# Altium PCB Exp 9.PcbDoc
Units mm, origin at the board's own origin, x right, y up, seen from the top; angles counter-clockwise.
Board outline 152.4 x 136.53 mm, 2 copper layers (Top Layer, Bottom Layer); 86 components, 149 nets, 293 pads, 0 vias.
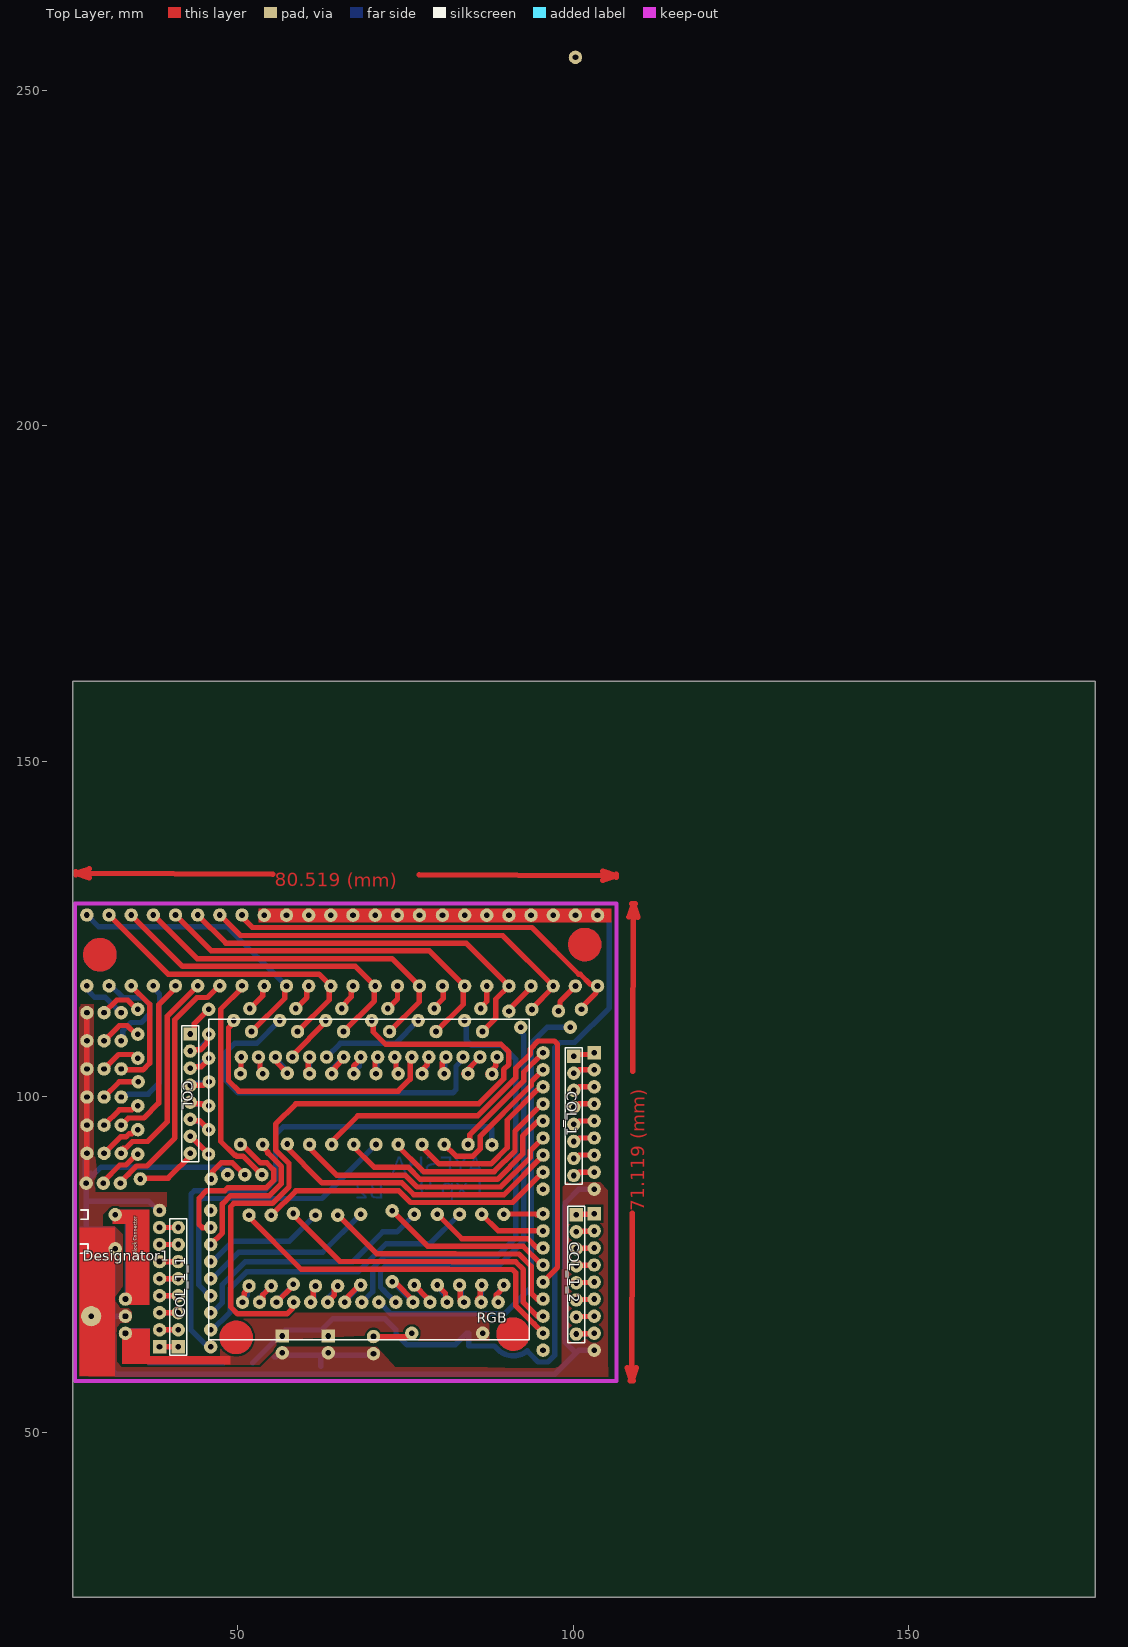
[diagram p0: Top Layer view]
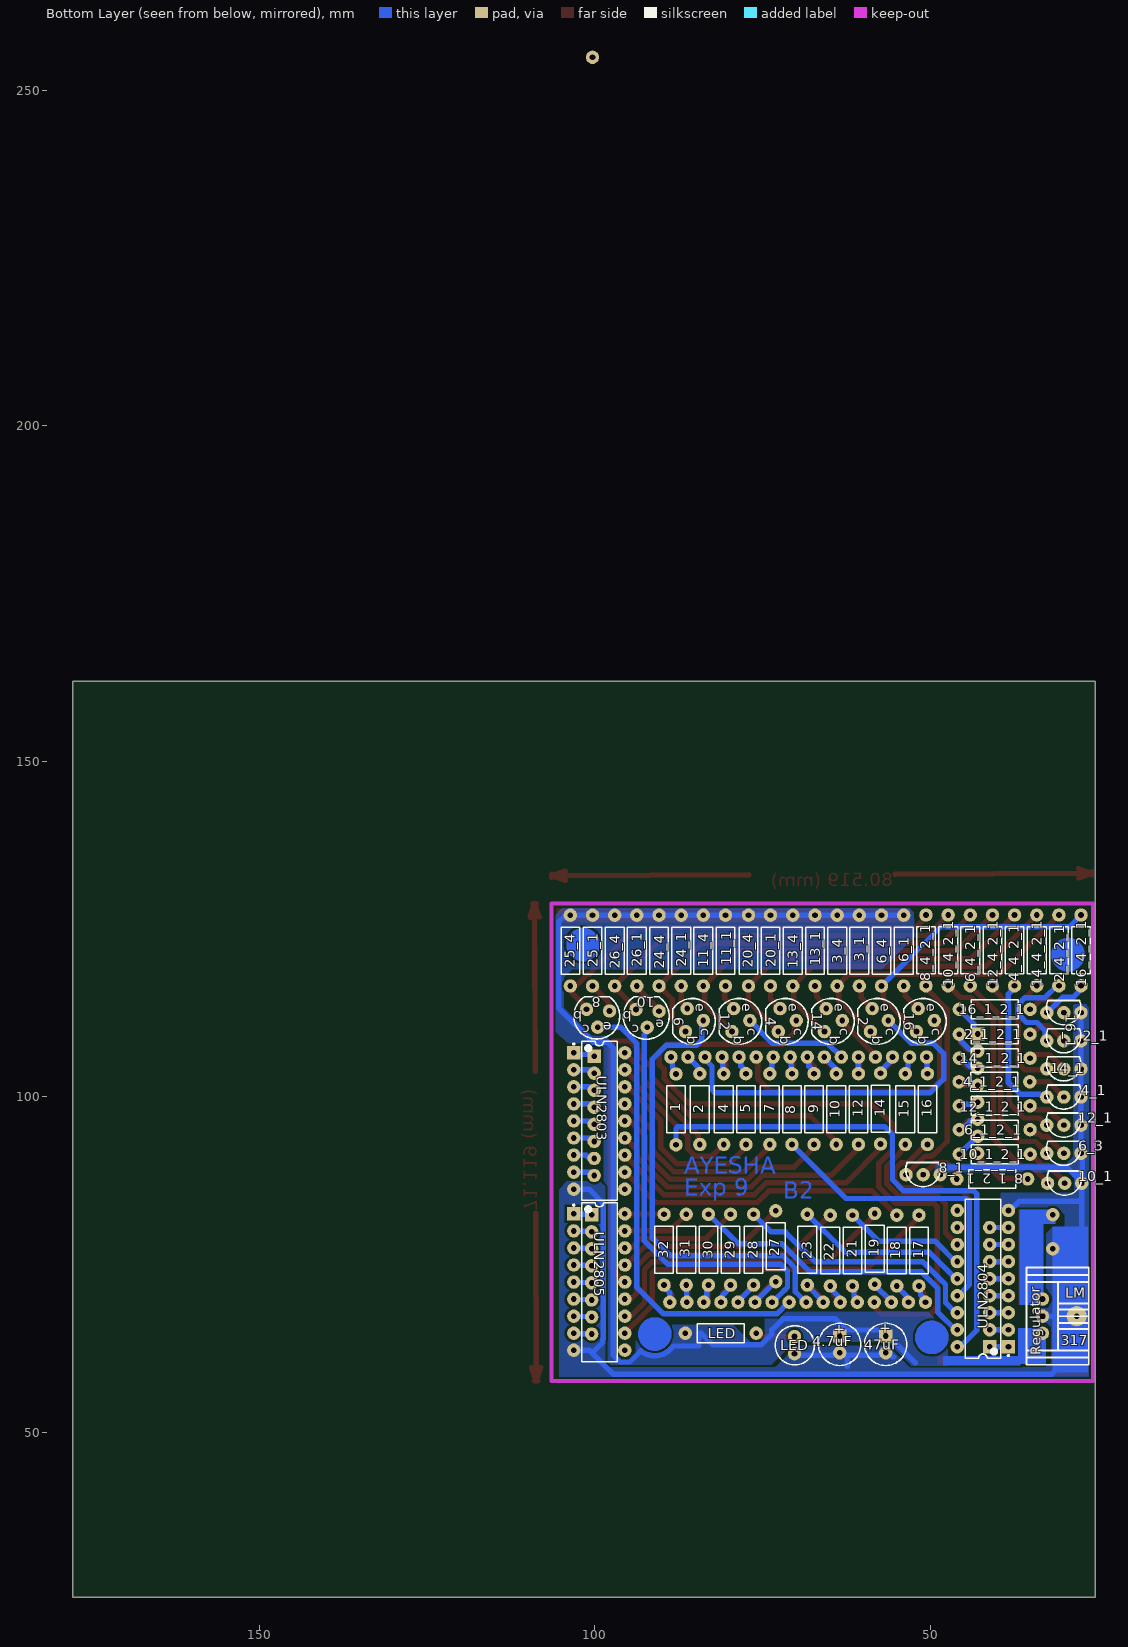
[diagram p1: Bottom Layer view, seen from below]

## Layer stack, top to bottom
Top Solder: solder mask 0.0102, Solder Resist, Dk 3.5
Top Layer: signal copper 0.0356
Dielectric 1: dielectric 0.32, FR-4, Dk 4.8
Bottom Layer: signal copper 0.0356
Bottom Solder: solder mask 0.0102, Solder Resist, Dk 3.5

## Board outline
25.4,25.4 177.8,25.4 177.8,161.925 25.4,161.925

## Design rules (kind name [scope] priority, off if disabled: settings)
Clearance [All] p1: gap=0.35 ignorepadtopadclearanceinfootprint=FALSE
PlaneClearance [All] p1: clearance=0.85
PolygonConnect [All] p1: connectstyle=Direct reliefconductorwidth=0.254 reliefentries=4 polygonreliefangle="90 Angle" airgapwidth=0.254
RoutingVias [All] p1: holewidth=0.711 width=1.27 viastyle="Through Hole" minholewidth=0.711 minwidth=1.27 maxholewidth=0.711 maxwidth=1.27
SolderMaskExpansion [All] p1: expansion=0.102 istentingtop=FALSE
Width [All] p1: maxlimit=0.8 minlimit=0.8 preferedwidth=0.8
29 further rules are at their usual default settings.

## Components (designator, comment, footprint, x,y, rotation, side; value= is the part's Value field where it differs from the comment)
1 "Comment" RES10.55-7X2.8#1 87.884,98.112 r270 bottom
2 "Comment" RES10.55-7X2.8#1 84.328,98.171 r270 bottom
2 "Comment" "TO-92 Packaging" 57.583,111.426 r0 bottom
2_1 "Comment" 2N3904 30.087,108.341 r0 bottom
2_1_2_1 "Comment" RES10.55-7X2.8#1 40.401,109.316 r180 bottom
2_4_2_1 "Comment" RES10.55-7X2.8#1 30.83,121.808 r90 bottom
3_1 "Comment" RES10.55-7X2.8#1 60.571,121.777 r90 bottom
3_4 "Comment" RES10.55-7X2.8#1 63.873,121.777 r90 bottom
4 "Comment" RES10.55-7X2.8#1 80.772,98.171 r270 bottom
4 "Comment" "TO-92 Packaging" 71.299,111.426 r0 bottom
4.7uF "Comment" CAPPR2.5-6.3x15 63.5,63.099 r270 bottom
4_1 "Comment" 2N3904 30.087,99.959 r0 bottom
4_1_2_1 "Comment" RES10.55-7X2.8#2 40.445,102.235 r180 bottom
4_4_2_1 "Comment" RES10.55-7X2.8#1 37.434,121.808 r90 bottom
5 "Comment" RES10.55-7X2.8#1 77.47,98.171 r270 bottom
6 "Comment" "TO-92 Packaging" 85.142,111.426 r0 bottom
6_1 "Comment" RES10.55-7X2.8#1 53.967,121.777 r90 bottom
6_1_2_1 "Comment" RES10.55-7X2.8#1 40.401,95.092 r180 bottom
6_3 "Comment" 2N3904 30.087,91.577 r0 bottom
6_4 "Comment" RES10.55-7X2.8#1 57.269,121.777 r90 bottom
6_4_2_1 "Comment" RES10.55-7X2.8#1 44.038,121.808 r90 bottom
7 "Comment" RES10.55-7X2.8#1 73.914,98.171 r270 bottom
8 "Comment" RES10.55-7X2.8#3 70.612,98.171 r270 bottom
8 "Comment" "TO-92 Packaging" 99.505,111.696 r90 bottom
8_1 "Comment" 2N3904 51.054,88.392 r0 bottom
8_1_2_1 "Comment" RES10.55-7X2.8#2 40.767,87.757 r0 bottom
8_4_2_1 "Comment" RES10.55-7X2.8#1 50.642,121.808 r90 bottom
9 "Comment" RES10.55-7X2.8#1 67.31,98.171 r270 bottom
10 "Comment" RES10.55-7X2.8#3 64.008,98.171 r270 bottom
10 "Comment" "TO-92 Packaging" 92.127,111.68 r90 bottom
10_1 "Comment" 2N3904 29.972,87.122 r0 bottom
10_1_2_1 "Comment" RES10.55-7X2.8#1 40.386,91.44 r180 bottom
10_4_2_1 "Comment" RES10.55-7X2.8#1 47.34,121.808 r90 bottom
11_1 "Comment" RES10.55-7X2.8#1 80.51,121.777 r90 bottom
11_4 "Comment" RES10.55-7X2.8#1 83.812,121.777 r90 bottom
12 "Comment" RES10.55-7X2.8#1 60.706,98.171 r270 bottom
12 "Comment" "TO-92 Packaging" 78.22,111.426 r0 bottom
12_1 "Comment" 2N3904 30.087,95.768 r0 bottom
12_1_2_1 "Comment" RES10.55-7X2.8#1 40.401,98.648 r180 bottom
12_4_2_1 "Comment" RES10.55-7X2.8#1 40.736,121.808 r90 bottom
13_1 "Comment" RES10.55-7X2.8#1 67.175,121.777 r90 bottom
13_4 "Comment" RES10.55-7X2.8#1 70.477,121.777 r90 bottom
14 "Comment" RES10.55-7X2.8#1 57.404,98.239 r270 bottom
14 "Comment" "TO-92 Packaging" 64.441,111.426 r0 bottom
14_1 "Comment" 2N3904 30.087,104.15 r0 bottom
14_1_2_1 "Comment" RES10.55-7X2.8#1 40.401,105.76 r180 bottom
14_4_2_1 "Comment" RES10.55-7X2.8#1 34.132,121.808 r90 bottom
15 "Comment" RES10.55-7X2.8#1 53.721,98.171 r270 bottom
16 "Comment" RES10.55-7X2.8#1 50.419,98.171 r270 bottom
16 "Comment" "TO-92 Packaging" 50.725,111.426 r0 bottom
16_1 "Comment" 2N3904 30.087,112.532 r0 bottom
16_1_2_1 "Comment" RES10.55-7X2.8#1 40.401,113.03 r180 bottom
16_4_2_1 "Comment" RES10.55-7X2.8#1 27.528,121.808 r90 bottom
17 "Comment" RES10.55-7X2.8#1 51.689,77.089 r270 bottom
18 "Comment" RES10.55-7X2.8#1 54.991,77.089 r270 bottom
19 "Comment" RES10.55-7X2.8#1 58.293,77.343 r270 bottom
20_1 "Comment" RES10.55-7X2.8#2 73.811,121.777 r90 bottom
20_4 "Comment" RES10.55-7X2.8#1 77.081,121.777 r90 bottom
21 "Comment" RES10.55-7X2.8#1 61.595,77.089 r270 bottom
22 "Comment" RES10.55-7X2.8#3 64.897,77.089 r270 bottom
23 "Comment" RES10.55-7X2.8#1 68.326,77.216 r270 bottom
24_1 "Comment" RES10.55-7X2.8#1 87.114,121.777 r90 bottom
24_4 "Comment" RES10.55-7X2.8#1 90.416,121.777 r90 bottom
25_1 "Comment" RES10.55-7X2.8#2 100.322,121.777 r90 bottom
25_4 "Comment" RES10.55-7X2.8#1 103.624,121.777 r90 bottom
26_1 "Comment" RES10.55-7X2.8#1 93.718,121.777 r90 bottom
26_4 "Comment" RES10.55-7X2.8#1 97.02,121.777 r90 bottom
27 "Comment" RES10.55-7X2.8#3 73.025,77.724 r270 bottom
28 "Comment" RES10.55-7X2.8#1 76.327,77.216 r270 bottom
29 "Comment" RES10.55-7X2.8#1 79.756,77.216 r270 bottom
30 "Comment" RES10.55-7X2.8#1 83.058,77.216 r270 bottom
31 "Comment" RES10.55-7X2.8#1 86.36,77.216 r270 bottom
32 "Comment" RES10.55-7X2.8#1 89.662,77.216 r270 bottom
47uF "Comment" CAPPR2.5-6.3x15 56.642,63.099 r270 bottom
COL "Comment" HDR1X8 42.926,109.347 r270 top
COL_1 "Comment" HDR1X8 100.076,106.045 r270 top
COL_1_1 "Comment" HDR1X8 41.148,62.738 r90 top
COL_1_2 "Comment" HDR1X8 100.457,82.423 r270 top
Designator1 "Comment" "PCB Block Connector" 31.496,79.883 r90 top
LED "Comment" RES10.55-7X2.8#1 81.221,64.77 r180 bottom
LED "Comment" LED 70.231,62.992 r180 bottom
Regulator "Comment" "LM317 with Heat Sink" 33.274,67.3 r270 bottom
RGB "Comment" "RGB 4.7X4.7" 69.68,87.656 r180 top
ULN2803 "Comment" DIP-18 99.314,96.393 r180 bottom
ULN2804 "Comment" DIP-18 42.164,72.898 r0 bottom
ULN2805 "Comment" DIP-18 99.314,72.39 r180 bottom

## Footprints (in the part's own frame and the unit in brackets; to place one, negate y for a bottom-side part, rotate by r counter-clockwise, add the part's x,y. Pads: shape width x height; smd on the part's side, far side on the other; paste and mask are expansions set on the pad)
2N3904 [mm]
  round 2 hole 0.7 slot 0.8 at 0 deg: b(0,0) c(2.55,0) e(-2.55,0)
  silkscreen extent -2.53,-1.8 2.59,1.8
CAPPR2.5-6.3x15 [mm] "Capacitor, Electrolytic, Radial; Body 6.3 x 15 mm (Dia.xH typ); Pin Spacing 2.5 mm (typ)"
  rect 2x2 hole 0.85: 1(-1.25,0)
  round 2 hole 0.85: 2(1.25,0)
  silkscreen extent -3.15,-3.15 3.15,3.15
DIP-18 [mm] "DIP; 18 Leads; Row Spacing 7.62 mm; Pitch 2.54 mm"
  rect 2x2 hole 0.85: 1(-3.81,10.16)
  round 2 hole 0.85: 2(-3.81,7.62) 3(-3.81,5.08) 4(-3.81,2.54) 5(-3.81,0) 6(-3.81,-2.54) 7(-3.81,-5.08) 8(-3.81,-7.62) 9(-3.81,-10.16) 10(3.81,-10.16) 11(3.81,-7.62) 12(3.81,-5.08) 13(3.81,-2.54) 14(3.81,0) 15(3.81,2.54) 16(3.81,5.08) 17(3.81,7.62) 18(3.81,10.16)
  silkscreen extent -3.94,-11.85 2.65,11.85, body extent -3.6,-11.8 3.6,11.8, height 5.08
HDR1X8 [mm] "Connector; Header; 8 Position"
  rect 2x2 hole 0.85: 1(0,0)
  round 2 hole 0.85: 2(2.54,0) 3(5.08,0) 4(7.62,0) 5(10.16,0) 6(12.7,0) 7(15.24,0) 8(17.78,0)
  silkscreen extent -1.27,-1.27 19.05,1.27
LED [mm]
  round 2 hole 0.85: 1(0,1.27) 2(0,-1.27)
  silkscreen extent -2.87,-2.95 2.98,2.89
"LM317 with Heat Sink" [mm]
  round 2 hole 0.85 slot 0.8 at 0 deg: adj(-2.55,0) in(2.55,0) out(0,0)
  round 3 hole 0.85: out(0,5.1)
  silkscreen extent -7.25,-2.4 7.25,6.9
"PCB Block Connector" [mm]
  round 2 hole 0.85: 1(-2.54,-0.254) 2(2.54,-0.24)
  silkscreen extent -3.22,3.82 3.26,4.96, body extent -5,-5.45 5.03,4.96, height 5.08
RES10.55-7X2.8#1 [mm] "Resistor, Axial; Body 7 x 2.8 mm (LxDia. max), Lead Dia. 0.65 mm (max)"
  round 2 hole 0.85: 1(-5.275,0) 2(5.275,0)
  silkscreen extent -3.5,-1.4 3.5,1.4
RES10.55-7X2.8#2 [mm] "Resistor, Axial; Body 7 x 2.8 mm (LxDia. max), Lead Dia. 0.65 mm (max)"
  round 2 hole 0.85: ""(-5.275,0) ""(5.275,0)
  silkscreen extent -3.5,-1.4 3.5,1.4
RES10.55-7X2.8#3 [mm] "Resistor, Axial; Body 7 x 2.8 mm (LxDia. max), Lead Dia. 0.65 mm (max)"
  round 2 hole 0.85: 1(-5.275,0) ""(5.275,0)
  silkscreen extent -3.5,-1.4 3.5,1.4
"RGB 4.7X4.7" [mm]
  round 2 hole 0.85: 1(-18.966,-18.262) 2(-16.426,-18.262) 3(-13.886,-18.262) 4(-11.346,-18.262) 5(-8.806,-18.262) 6(-6.266,-18.262) 7(-3.726,-18.262) 8(-1.186,-18.262) 9(1.354,-18.262) 10(3.894,-18.262) 11(6.434,-18.262) 12(8.974,-18.262) 13(11.514,-18.262) 14(14.054,-18.262) 15(16.594,-18.262) 16(19.134,-18.262) 17(18.966,18.262) 18(16.426,18.262) 19(13.886,18.262) 20(11.346,18.262) 21(8.806,18.262) 22(6.266,18.262) 23(3.726,18.262) 24(1.186,18.262) 25(-1.354,18.262) 26(-3.894,18.262) 27(-6.434,18.262) 28(-8.974,18.262) 29(-11.514,18.262) 30(-14.054,18.262) 31(-16.594,18.262) 32(-19.134,18.262)
  silkscreen extent -23.78,-23.9 23.99,23.89
"TO-92 Packaging" [mm] "for 2N3904"
  round 2 hole 0.85: P_b(1.334,1.714) P_c(-1.333,0.063) P_e(1.08,-1.715)
  silkscreen extent -3.1,-3.23 3.22,3.61

## Free pads (board coordinates)
  round 2 hole 0.85: 2(100.33,254.889)

## Nets (pads, with @x,y where several pads share a name; then routed paths per layer and width w, separated by ;. In a path a pad name is that pad's centre, name@x,y a point inside that pad or via, vN(x,y) a via of type N, cw(c..) or ccw(c..) an arc to the next point about the centre after c; other vN are vias at no path point)
1: 1.1 RGB.1 | length 6.1
  Top Layer w0.8: 1.1@87.249,103.387 87.479,103.617 87.789,103.617 88.114,103.941 88.114,104.252 88.457,104.595 88.457,105.729 RGB.1
  Bottom Layer w0.8: 1.1 87.884,103.712 88.416,104.244 88.416,105.688 RGB.1
2: 2.1 RGB.2 | length 6.7
  Top Layer w0.8: 2.1@83.693,103.446 83.693,103.476 86.106,105.889 RGB.2
  Bottom Layer w0.8: 2.1 84.558,103.676 84.558,104.355 86.106,105.904 RGB.2
3: 2.P_c RGB.3 | length 54.9
  Bottom Layer w0.8: 2.P_c 52.836,107.95 49.53,107.95 48.006,106.426 48.006,102.616 50.038,100.584 82.053,100.584 82.522,101.053 82.522,104.549 83.566,105.593 RGB.3
4: 4.1 RGB.4 | length 5.3
  Top Layer w0.8: 4.1@80.391,103.446 80.499,103.554 80.499,105.066 81.026,105.593 RGB.4
  Bottom Layer w0.8: 4.1 80.899,103.573 80.899,105.791 RGB.4
5: 5.1 RGB.5 | length 5.6
  Top Layer w0.8: 5.1@77.089,103.446 77.089,103.633 78.256,104.8 RGB.5@78.256,105.64
  Bottom Layer w0.8: 5.1 77.47,103.771 78.256,104.557 78.256,105.688 RGB.5
6: 16.P_c RGB.6 | length 41.2
  Top Layer w0.8: 16.P_c 49.391,111.038 48.62,110.267 48.62,102.383 50.165,100.838 73.914,100.838 75.692,102.616 75.692,104.849 75.716,104.874 75.716,105.688 RGB.6
7: 7.1 RGB.7 | length 5.1
  Top Layer w0.8: RGB.7 73.589,105.735 73.589,103.643 7.1@73.66,103.572
  Bottom Layer w0.8: RGB.7 73.636,105.688 73.636,104.049 73.914,103.771 7.1
8: 8.1 RGB.8 | length 4.5
  Top Layer w0.8: 8.1@70.293,103.827 70.466,104 70.466,105.193 70.636,105.364 RGB.8@70.636,105.64
  Bottom Layer w0.8: 8.1 70.739,103.573 70.739,105.791 RGB.8
9: 9.1 RGB.9 | length 5.5
  Top Layer w0.8: 9.1@67.056,103.446 67.286,103.676 67.286,104.553 68.096,105.364 RGB.9@68.096,105.64
  Bottom Layer w0.8: 9.1 67.31,103.771 68.096,104.557 68.096,105.688 RGB.9
10: 10.1 RGB.10 | length 6.4
  Top Layer w0.8: 10.1 64.008,103.771 64.544,104.306 64.544,104.422 65.786,105.664 RGB.10
  Bottom Layer w0.8: 10.1 64.238,103.676 64.238,104.355 65.786,105.904 RGB.10
11: 12.P_c RGB.11 | length 15.9
  Bottom Layer w0.8: RGB.11 65.29,107.962 73.486,107.962 12.P_c
12: 12.1 RGB.12 | length 4.6
  Top Layer w0.8: 12.1@60.198,103.843 60.365,103.843 60.523,104 60.523,105.593 RGB.12@60.421,105.695
  Bottom Layer w0.8: 12.1 RGB.12
13: 14.P_c RGB.13 | length 7.5
  Top Layer w0.8: RGB.13 58.166,106.17 63.107,111.111 14.P_c
14: 14.1 RGB.14 | length 6.7
  Top Layer w0.8: RGB.14@55.118,105.918 55.301,105.918 RGB.14@55.464,105.756 ; RGB.14 55.856,105.688 55.856,105.065 57.15,103.771 14.1@57.15,103.446
  Bottom Layer w0.8: RGB.14 55.626,105.605 57.404,103.827 14.1
15: 15.1 RGB.15 | length 5.6
  Top Layer w0.8: RGB.15@52.808,105.364 RGB.15@52.808,105.434 ; RGB.15 53.316,105.688 53.316,104.303 53.848,103.771 15.1@53.848,103.446
  Bottom Layer w0.8: RGB.15 53.316,105.688 53.316,104.176 53.721,103.771 15.1
16: 16.1 RGB.16 | length 5
  Top Layer w0.8: 16.1@50.546,103.446 50.49,103.502 50.49,105.862 RGB.16
  Bottom Layer w0.8: 16.1 50.482,103.51 50.482,105.855 RGB.16
17: 17.2 RGB.17 | length 5.5
  Top Layer w0.8: RGB.17@50.967,69.394 50.943,69.418 50.943,70.438 50.967,70.463 50.967,70.767 51.459,71.26 51.459,71.79 17.2@51.435,71.814
  Bottom Layer w0.8: RGB.17 50.713,69.719 51.459,70.465 51.459,71.584 17.2
18: 18.2 RGB.18 | length 6.1
  Top Layer w0.8: RGB.18@53.507,69.394 53.737,69.624 53.737,70.489 54.737,71.489 18.2@54.737,71.814
  Bottom Layer w0.8: RGB.18 53.483,69.624 53.483,70.211 54.991,71.719 18.2
19: 19.2 RGB.19 | length 7
  Top Layer w0.8: RGB.19@56.047,69.394 56.047,69.608 58.039,71.6 19.2@58.039,71.814
  Bottom Layer w0.8: RGB.19 55.793,69.481 58.293,71.981 19.2
20: 4.P_c RGB.20 | length 109.9
  Top Layer w0.8: RGB.20@58.277,69.013 58.103,68.84 58.103,68.402 57.345,67.644 49.988,67.644 48.963,68.669 48.963,83.645 49.432,84.114 55.183,84.114 57.654,86.585 57.654,90.07 55.654,92.07 55.654,95.913 58.674,98.933 85.905,98.933 89.634,102.662 89.634,104.063 90.396,104.825 90.396,106.643 89.216,107.823 72.046,107.823 70.195,109.674 70.195,111.133 4.P_c
21: 21.2 RGB.21 | length 5.2
  Top Layer w0.8: RGB.21@61.127,69.394 61.234,69.501 61.234,71.707 21.2@61.341,71.814
  Bottom Layer w0.8: RGB.21 60.873,69.719 61.365,70.211 61.365,71.584 21.2
22: 22. RGB.22 | length 5.9
  Top Layer w0.8: RGB.22@63.667,69.394 63.667,69.719 64.413,70.465 64.413,71.584 22.@64.643,71.814
  Bottom Layer w0.8: RGB.22 63.643,69.624 63.643,70.235 64.897,71.489 22.
23: 23.2 RGB.23 | length 6.7
  Top Layer w0.8: RGB.23@66.207,69.394 66.437,69.624 66.437,70.211 67.945,71.719 23.2@67.945,71.814
  Bottom Layer w0.8: RGB.23 65.953,69.481 68.326,71.854 23.2
24: 6.P_c RGB.24 | length 67.1
  Bottom Layer w0.8: RGB.24 68.558,69.394 70.104,70.94 70.104,74.447 71.984,76.327 88.798,76.327 91.412,78.941 91.412,105.627 89.371,107.668 84.864,107.668 84.038,108.494 84.038,111.133 6.P_c
25: 8.P_c RGB.25 | length 68.2
  Bottom Layer w0.8: RGB.25 71.098,69.394 72.848,67.644 89.742,67.644 93.754,71.656 93.754,107.978 96.139,110.363 8.P_c
26: 10.P_c RGB.26 | length 60.8
  Bottom Layer w0.8: RGB.26 73.508,69.394 71.758,71.144 71.744,71.144 71.275,71.613 71.275,73.991 72.341,75.057 89.154,75.057 92.604,78.507 92.604,109.278 92.42,109.463 92.42,110.117 10.P_c
27: 27. RGB.27 | length 8.8
  Top Layer w0.8: 27.@73.025,71.941 73.301,72.217 73.577,72.217 76.113,69.68 RGB.27@76.113,69.521
  Bottom Layer w0.8: 27. 73.042,72.449 76.096,69.394 RGB.27
28: 28.2 RGB.28 | length 6.8
  Top Layer w0.8: 28.2 78.308,69.96 78.308,69.684 RGB.28@78.145,69.521
  Bottom Layer w0.8: 28.2 76.327,71.831 78.653,69.504 RGB.28
29: 29.2 RGB.29 | length 5.8
  Top Layer w0.8: 29.2 79.756,71.926 80.963,70.719 RGB.29@80.963,69.799
  Bottom Layer w0.8: 29.2 79.756,71.616 80.963,70.409 80.963,69.624 RGB.29
30: 30.2 RGB.30 | length 5.3
  Top Layer w0.8: 30.2 83.142,71.857 83.142,69.605 RGB.30@83.225,69.521
  Bottom Layer w0.8: 30.2 83.288,71.711 83.288,70.164 83.733,69.719 RGB.30
31: 31.2 RGB.31 | length 5.2
  Top Layer w0.8: RGB.31@85.765,69.521 85.765,69.846 86.13,70.211 86.13,71.711 31.2
  Bottom Layer w0.8: RGB.31 86.317,69.438 86.317,71.897 31.2
32: 32.2 RGB.32 | length 5.9
  Top Layer w0.8: RGB.32@88.305,69.521 88.535,69.751 88.535,70.489 89.662,71.616 32.2
  Bottom Layer w0.8: RGB.32 88.846,69.427 88.846,70.872 89.662,71.688 32.2
130: 
D1: COL_1_1.1 ULN2804.1 | length 5.6
  Top Layer w0.8: ULN2804.1 COL_1_1.1
  Bottom Layer w0.8: ULN2804.1 COL_1_1.1
D2: COL_1.1 ULN2803.1 | length 6.5
  Top Layer w0.8: COL_1.1 100.33,106.299 102.87,106.299 ULN2803.1
  Bottom Layer w0.8: COL_1.1 100.33,106.299 102.87,106.299 ULN2803.1
D3: 2_1_2_1.1 COL.2 | length 8.7
  Top Layer w0.8: COL.2 43.11,106.991 44.432,106.991 45.446,108.006 45.446,109.087 2_1_2_1.1
  Bottom Layer w0.8: COL.2 43.156,107.037 44.172,107.037 45.446,108.311 45.446,109.087 2_1_2_1.1
D4: COL_1.2 ULN2803.2 | length 6.5
  Top Layer w0.8: COL_1.2 100.401,103.505 100.909,104.013 ULN2803.2
  Bottom Layer w0.8: COL_1.2 100.401,103.505 100.909,104.013 ULN2803.2
D5: COL_1.3 ULN2803.3 | length 6.5
  Top Layer w0.8: COL_1.3 100.401,100.965 100.909,101.473 ULN2803.3
  Bottom Layer w0.8: COL_1.3 100.401,100.965 100.909,101.473 ULN2803.3
D6: 16_1_2_1.1 COL.1 | length 9.6
  Top Layer w0.8: COL.1 43.508,109.929 43.508,110.862 16_1_2_1.1
  Bottom Layer w0.8: COL.1 43.526,109.947 43.526,110.88 16_1_2_1.1
D7: COL_1.4 ULN2803.4 | length 6.5
  Top Layer w0.8: COL_1.4 100.401,98.425 100.909,98.933 ULN2803.4
  Bottom Layer w0.8: COL_1.4 100.401,98.425 100.909,98.933 ULN2803.4
D8: COL_1_1.4 ULN2804.4 | length 5.7
  Top Layer w0.8: ULN2804.4@38.481,70.358 COL_1_1.4 COL_1_1.4@41.402,70.358
  Bottom Layer w0.8: ULN2804.4 COL_1_1.4
D9: COL_1.5 ULN2803.5 | length 6.5
  Top Layer w0.8: COL_1.5 100.401,95.885 100.909,96.393 ULN2803.5
  Bottom Layer w0.8: COL_1.5 100.401,95.885 100.909,96.393 ULN2803.5
D10: COL_1_2.5 ULN2805.5 | length 5.4
  Top Layer w0.8: COL_1_2.5 100.52,72.326 103.06,72.326 ULN2805.5
  Bottom Layer w0.8: COL_1_2.5 100.52,72.326 103.06,72.326 ULN2805.5
D11: 12_1_2_1.1 COL.5 | length 5.9
  Top Layer w0.8: COL.5 43.156,98.957 43.97,98.957 43.995,98.933 44.607,98.933 44.662,98.878 45.446,98.878 12_1_2_1.1
  Bottom Layer w0.8: COL.5 43.251,99.187 43.56,98.878 45.446,98.878 12_1_2_1.1
D12: COL_1.6 ULN2803.6 | length 6.5
  Top Layer w0.8: COL_1.6 100.401,93.345 100.909,93.853 ULN2803.6
  Bottom Layer w0.8: COL_1.6 100.401,93.345 100.909,93.853 ULN2803.6
D13: 14_1_2_1.1 COL.3 | length 6.9
  Top Layer w0.8: COL.3 43.156,104.497 44.607,104.497 45.676,105.565 14_1_2_1.1
  Bottom Layer w0.8: COL.3 43.156,104.497 44.088,104.497 45.351,105.76 14_1_2_1.1
D14: COL_1.7 ULN2803.7 | length 6.5
  Top Layer w0.8: COL_1.7 100.401,90.805 100.909,91.313 ULN2803.7
  Bottom Layer w0.8: COL_1.7 100.306,91.035 101.085,91.035 101.363,91.313 ULN2803.7
D15: COL_1_1.7 ULN2804.7 | length 5.7
  Top Layer w0.8: ULN2804.7@38.481,77.978 COL_1_1.7 COL_1_1.7@41.402,77.978
  Bottom Layer w0.8: ULN2804.7 COL_1_1.7
D16: COL_1_1.8 ULN2804.8 | length 5.7
  Top Layer w0.8: ULN2804.8@38.481,80.518 COL_1_1.8 COL_1_1.8@41.402,80.518
  Bottom Layer w0.8: ULN2804.8 COL_1_1.8
D17: COL_1_2.8 ULN2805.8 | length 5.4
  Top Layer w0.8: COL_1_2.8 100.52,64.706 103.06,64.706 ULN2805.8
  Bottom Layer w0.8: COL_1_2.8 100.52,64.706 103.06,64.706 ULN2805.8
D18: COL_1.8 ULN2803.8 | length 6.5
  Top Layer w0.8: COL_1.8 100.401,88.265 100.909,88.773 ULN2803.8
  Bottom Layer w0.8: COL_1.8 100.401,88.265 100.909,88.773 ULN2803.8
D19: COL_1_2.7 ULN2805.7 | length 5.4
  Top Layer w0.8: COL_1_2.7 100.52,67.246 103.06,67.246 ULN2805.7
  Bottom Layer w0.8: COL_1_2.7 100.52,67.246 103.06,67.246 ULN2805.7
D20: 4_1_2_1.@45.72,102.235 COL.4 | length 6
  Top Layer w0.8: COL.4 44.887,101.727 45.395,102.235 4_1_2_1.@45.72,102.235
  Bottom Layer w0.8: COL.4 43.251,101.727 43.529,102.005 45.49,102.005 4_1_2_1.@45.72,102.235
D21: COL_1_1.6 ULN2804.6 | length 5.7
  Top Layer w0.8: ULN2804.6@38.481,75.438 COL_1_1.6 COL_1_1.6@41.402,75.438
  Bottom Layer w0.8: ULN2804.6 COL_1_1.6
D22: COL_1_2.6 ULN2805.6 | length 5.4
  Top Layer w0.8: COL_1_2.6 100.52,69.787 103.06,69.787 ULN2805.6
  Bottom Layer w0.8: COL_1_2.6 100.52,69.787 103.06,69.787 ULN2805.6
D23: COL_1_1.5 ULN2804.5 | length 5.7
  Top Layer w0.8: ULN2804.5@38.481,72.898 COL_1_1.5 COL_1_1.5@41.402,72.898
  Bottom Layer w0.8: ULN2804.5 COL_1_1.5
D24: 6_1_2_1.1 COL.6 | length 6.8
  Top Layer w0.8: COL.6 43.156,96.417 44.351,96.417 6_1_2_1.1
  Bottom Layer w0.8: COL.6 43.156,96.417 44.026,96.417 45.351,95.092 6_1_2_1.1
D25: 8_1_2_1.@35.492,87.757 COL.8 | length 9.7
  Top Layer w0.8: 8_1_2_1.@35.179,87.884 39.624,87.884 COL.8@43.307,91.567
D26: 10_1_2_1.1 COL.7 | length 7.8
  Top Layer w0.8: COL.7 43.242,94.107 43.307,94.042 43.307,93.76 45.627,91.44 10_1_2_1.1
  Bottom Layer w0.8: COL.7 42.96,94.107 45.627,91.44 10_1_2_1.1
D27: COL_1_2.4 ULN2805.4 | length 5.4
  Top Layer w0.8: COL_1_2.4 100.52,74.867 103.06,74.867 ULN2805.4
  Bottom Layer w0.8: COL_1_2.4 100.52,74.867 103.06,74.867 ULN2805.4
D28: COL_1_1.3 ULN2804.3 | length 5.8
  Top Layer w0.8: ULN2804.3@38.481,67.818 COL_1_1.3 41.337,67.818 41.402,67.883 COL_1_1.3@41.402,67.818
  Bottom Layer w0.8: ULN2804.3 COL_1_1.3
D29: COL_1_2.3 ULN2805.3 | length 5.4
  Top Layer w0.8: COL_1_2.3 100.52,77.406 103.06,77.406 ULN2805.3
  Bottom Layer w0.8: COL_1_2.3 100.52,77.406 103.06,77.406 ULN2805.3
D30: COL_1_1.2 ULN2804.2 | length 5.6
  Top Layer w0.8: ULN2804.2 COL_1_1.2
  Bottom Layer w0.8: ULN2804.2 COL_1_1.2
D31: COL_1_2.2 ULN2805.2 | length 5.4
  Top Layer w0.8: COL_1_2.2 100.52,79.947 103.06,79.947 ULN2805.2
  Bottom Layer w0.8: COL_1_2.2 100.52,79.947 103.06,79.947 ULN2805.2
D32: COL_1_2.1 ULN2805.1 | length 5.4
  Top Layer w0.8: COL_1_2.1 100.52,82.486 103.06,82.486 ULN2805.1
  Bottom Layer w0.8: COL_1_2.1 100.52,82.486 103.06,82.486 ULN2805.1
GND: 2_1.e 4.7uF.2 4_1.e 6_3.e 8_1.e 10_1.e 12_1.e 14_1.e 16_1.e 47uF.2 Designator1.1 LED.2@70.231,61.722 Regulator.out ULN2803.9 ULN2804.9 ULN2805.9 | length 245.8
  Top Layer w0.8: 10_1.e 27.48,87.179 27.48,112.475 16_1.e
  Bottom Layer w0.8: 10_1.e@27.305,87.239 10_1.e@27.305,87.757 ; 10_1.e 27.422,84.455 ; 10_1.e@27.537,87.386 29.658,89.507 47.401,89.507 47.754,89.154 8_1.e@48.631,89.154 ; 16_1.e 2_1.e 14_1.e 4_1.e 27.537,95.768 6_3.e 27.537,91.252 27.305,91.02 10_1.e@27.305,87.757 ; 28.139,88.591 10_1.e@27.305,87.757 ; 29.259,69.485 31.444,67.3 ; Designator1.1 27.422,77.343 ; Regulator.out@33.274,67.3 31.444,67.3 ; ULN2804.9@38.354,82.804 36.703,84.455 27.422,84.455 ; 55.414,61.214 55.682,61.214 56.088,61.619 57.559,61.619 57.711,61.468 62.357,61.468 ; 62.357,59.817 62.357,61.468 ; LED.2@69.375,61.468 64.569,61.468 64.417,61.619 63.651,61.619 63.5,61.468 62.357,61.468 ; ULN2805.9 100.838,62.23 100.395,61.787 ; ULN2803.9 100.838,86.233 98.806,84.201 98.806,83.833 98.707,83.734 98.707,63.918 98.806,63.819 98.806,63.376 100.395,61.787 ; 27.422,77.343 27.422,66.548 28.174,67.3 31.444,67.3 ; 27.422,77.343 27.422,84.455 ; 31.444,67.3 31.397,67.253 31.399,67.251 31.399,59.145 31.868,58.676 97.284,58.676 100.395,61.787
i1: 1.2 ULN2804.18 | length 79.9
  Bottom Layer w0.8: ULN2804.18@46.101,62.484 45.776,62.484 43.046,65.214 43.046,85.51 43.522,85.986 53.975,85.986 55.626,87.637 55.626,94.361 56.769,95.504 87.63,95.504 87.884,95.25 1.2
i2: 2.2 ULN2803.18 | length 18
  Top Layer w0.8: 2.2@84.155,93.048 84.558,93.45 84.558,94.333 92.604,102.379 92.604,103.653 95.241,106.29 ULN2803.18@95.241,106.417
i3: 
i4: 4.2 ULN2803.17 | length 22.2
  Top Layer w0.8: 4.2 82.522,91.146 85.053,91.146 86.134,92.227 86.134,94.111 93.225,101.202 93.754,101.731 93.754,102.263 ULN2803.17
i5: 5.2 ULN2803.16 | length 25.7
  Top Layer w0.8: 5.2@77.151,92.834 79.989,89.996 87.747,89.996 90.17,92.419 90.17,96.521 ULN2803.16@94.707,101.057
i6: 
i7: 7.2 ULN2803.15 | length 28.5
  Top Layer w0.8: 7.2@73.533,92.896 73.629,92.896 77.679,88.846 88.223,88.846 91.32,91.943 91.32,94.876 94.693,98.249
i8: 8. ULN2804.15 | length 45
  Bottom Layer w0.8: ULN2804.15@46.039,70.104 44.196,71.947 44.196,84.367 44.665,84.836 62.552,84.836 8.
i9: 9.2 ULN2803.14 | length 34.6
  Top Layer w0.8: 9.2@67.148,92.677 70.356,89.469 75.43,89.469 77.203,87.696 88.699,87.696 92.47,91.467 92.47,94.121 ULN2803.14@94.576,96.227
i10: 10. ULN2805.14 | length 78.2
  Top Layer w0.8: 10.@63.627,92.896 67.886,97.155 85.753,97.155 91.454,102.856 91.454,104.256 93.599,106.401 93.599,107.123 94.779,108.303 97.194,108.303 97.663,107.834 97.663,74.549 ULN2805.14
i11: 
i12: 12.2 ULN2803.13 | length 41.5
  Top Layer w0.8: 12.2@60.325,92.896 60.325,92.71 64.716,88.319 74.954,88.319 76.727,86.546 89.176,86.546 93.62,90.99 93.62,91.969 ULN2803.13
i13: 
i14: 14.2 ULN2803.12 | length 44.2
  Top Layer w0.8: 14.2@57.023,92.896 57.023,92.71 62.564,87.169 74.477,87.169 76.25,85.396 89.652,85.396 95.504,91.248 ULN2803.12
i15: 15.2 ULN2804.12 | length 24.1
  Top Layer w0.8: ULN2804.12@45.974,77.724 ULN2804.12 47.724,79.728 47.724,84.033 48.955,85.264 54.706,85.264 56.504,87.062 56.504,89.593 54.504,91.593 54.504,91.788 53.721,92.571 15.2
i16: 16.2 ULN2804.11 | length 25.9
  Top Layer w0.8: ULN2804.11@45.744,80.494 44.728,80.494 44.224,80.998 44.224,84.864 45.367,86.007 48.072,86.007 48.479,86.414 54.23,86.414 55.354,87.538 55.354,89.117 54.329,90.142 53.405,90.142 50.651,92.896 16.2
i17: 17.1 ULN2805.11 | length 54.2
  Top Layer w0.8: 17.1@51.435,82.296 59.436,74.295 81.447,74.295 81.482,74.26 90.957,74.26 91.426,73.791 91.426,68.873 94.139,66.16 94.179,66.16 95.504,64.835 ULN2805.11
i18: 18.1 ULN2803.11 | length 44.6
  Top Layer w0.8: 18.1 55.059,82.364 58.674,85.979 74.041,85.979 75.779,84.241 90.972,84.241 ULN2803.11
i19: 19.1 ULN2805.12 | length 45.4
  Top Layer w0.8: 19.1@58.293,82.364 65.212,75.445 81.923,75.445 81.958,75.41 91.434,75.41 92.576,74.268 92.576,69.349 ULN2805.12@94.615,67.31
i20: 
i21: 21.1 ULN2804.13 | length 18.6
  Bottom Layer w0.8: ULN2804.13@45.974,75.184 49.276,78.486 57.717,78.486 21.1
i22: 22.1 ULN2805.13 | length 37.2
  Top Layer w0.8: 22.1 64.956,82.364 70.725,76.595 82.399,76.595 82.434,76.56 91.91,76.56 93.726,74.744 93.726,70.739 ULN2805.13@94.615,69.85
i23: 23.1 ULN2804.14 | length 26.3
  Bottom Layer w0.8: ULN2804.14@45.974,72.644 46.291,72.962 50.165,76.835 62.67,76.835 23.1@68.199,82.364
i24: 
i25: 
i26: 
i27: 27.1 ULN2805.15 | length 25
  Top Layer w0.8: 27.1@73.025,82.491 73.141,82.607 73.417,82.607 78.279,77.745 82.876,77.745 82.911,77.71 92.548,77.71 ULN2805.15@94.978,75.279
i28: 28.1 ULN2804.16 | length 38.1
  Bottom Layer w0.8: ULN2804.16@45.974,67.564 47.724,69.314 47.724,72.03 51.132,75.438 67.183,75.438 71.614,79.869 73.705,79.869 28.1
i29: 29.1 ULN2805.16 | length 16.9
  Top Layer w0.8: 29.1 83.387,78.86 93.225,78.86 ULN2805.16@94.615,77.47
i30: 30.1 ULN2804.17 | length 46.4
  Bottom Layer w0.8: ULN2804.17@45.974,65.024 48.895,67.945 48.895,71.495 51.314,73.914 67.945,73.914 72.136,78.105 78.672,78.105 30.1
i31: 31.1 ULN2805.17 | length 9.3
  Top Layer w0.8: 31.1 88.841,80.01 ULN2805.17@94.615,80.01
i32: 32.1 ULN2805.18 | length 5
  Top Layer w0.8: 32.1 89.691,82.521 ULN2805.18@94.586,82.521 ; ULN2805.18@94.586,82.394 ULN2805.18@94.615,82.423
Input: Designator1.2 Regulator.adj | length 14
  Bottom Layer w0.8: Designator1.2 31.952,82.207 33.031,82.207 33.5,81.738 33.5,70.076 Regulator.adj
LED_R: LED.1@70.231,64.262 LED.2@75.946,64.77 | length 4.9
  Top Layer w0.8: LED.1@70.231,64.262 LED.2@75.112,64.262
N2b: 2_1.b 2_1_2_1.2 | length 6.5
  Top Layer w0.8: 2_1.b 32.363,110.617 33.528,110.617 34.829,109.316 2_1_2_1.2
N2c: 2_1.c 2_4_2_1.1 | length 15.3
  Bottom Layer w0.8: 2_4_2_1.1 31.155,116.533 32.907,114.78 35.851,114.78 36.876,113.755 36.876,112.305 35.637,111.066 34.104,111.066 32.867,109.829 32.867,108.571 2_1.c
N2e: 
N4b: 4_1.b 4_1_2_1.@35.17,102.235 | length 6
  Top Layer w0.8: 4_1.b 32.363,102.235 4_1_2_1.@35.17,102.235
N4c: 4_1.c 4_4_2_1.1 | length 21.7
  Top Layer w0.8: 4_1.c 4_1.c@32.867,100.189
  Bottom Layer w0.8: 4_1.c 32.867,100.189 33.496,100.189 33.706,100.398 36.644,100.398 38.354,102.108 38.354,115.288 37.434,116.208 4_4_2_1.1
N4e: 
N6b: 6_1_2_1.2 6_3.b | length 6.5
  Top Layer w0.8: 6_3.b 32.528,94.018 33.362,94.018 33.837,94.492 34.201,94.492 34.801,95.092 6_1_2_1.2
N6c: 6_3.c 6_4_2_1.1 | length 30.6
  Top Layer w0.8: 6_3.c 6_3.c@32.962,91.577 ; 6_3.c@32.962,92.322 33.293,92.322 34.313,93.342 36.573,93.342 39.49,96.259 39.49,111.985 6_4_2_1.1
N6e: 
N8b: 8_1.b 8_1_2_1.@46.042,87.757 | length 7.2
  Top Layer w0.8: 8_1_2_1.@46.042,87.757 46.272,87.987 46.272,88.878 47.536,90.142 49.229,90.142 50.979,88.392 8_1.b
N8c: 8_1.c 8_4_2_1.1 | length 32.6
  Top Layer w0.8: 8_4_2_1.1 50.642,116.208 47.47,113.036 47.47,93.37 49.548,91.292 49.705,91.292 49.851,91.146 50.775,91.146 8_1.c@53.529,88.392
N8e: 
N10b: 10_1.b 10_1_2_1.2 | length 7.1
  Top Layer w0.8: 10_1.b 29.972,87.376 32.423,89.827 32.445,89.827 33.362,89.827 34.975,91.44 10_1_2_1.2
N10c: 10_1.c 10_4_2_1.1 | length 37.4
  Top Layer w0.8: 10_1.c 32.522,87.259 33.742,88.479 33.742,88.482 34.95,89.69 36.477,89.69 40.64,93.853 40.64,111.508 43.914,114.783 45.486,114.783 47.236,116.533 10_4_2_1.1
N10e: 
N12b: 12_1.b 12_1_2_1.2 | length 6.2
  Top Layer w0.8: 12_1.b 32.368,98.048 34.201,98.048 34.801,98.648 12_1_2_1.2
N12c: 12_1.c 12_4_2_1.1 | length 25.5
  Top Layer w0.8: 12_1.c 33.712,96.842 36.009,96.842 38.227,99.06 38.227,113.699 40.736,116.208 12_4_2_1.1
N12e: 
N14b: 14_1.b 14_1_2_1.2 | length 6.2
  Top Layer w0.8: 14_1.b 32.236,106.299 34.263,106.299 34.801,105.76 14_1_2_1.2
N14c: 14_1.c 14_4_2_1.1 | length 17.4
  Top Layer w0.8: 14_1.c 32.883,104.15 33.023,104.01 35.897,104.01 36.876,104.99 36.876,113.789 14_4_2_1.1
N14e: 
N16b: 16_1.b 16_1_2_1.2 | length 6.4
  Top Layer w0.8: 16_1.b 31.982,114.427 33.595,114.427 34.992,113.03 16_1_2_1.2
N16c: 16_1.c 16_4_2_1.1 | length 7.1
  Bottom Layer w0.8: 16_4_2_1.1 27.758,116.303 27.758,115.752 28.702,114.808 30.286,114.808 32.562,112.532 16_1.c
N16e: 
P2b: 2.P_b 2_4_2_1.2 3_4.1 | length 46.2
  Top Layer w0.8: 2_4_2_1.2 39.63,118.283 62.092,118.283 3_4.1 ; 2.P_b 63.643,114.439 63.643,116.357 3_4.1@63.788,116.502
P2c: 
P2e: 2.P_e 3_1.1 | length 4.2
  Top Layer w0.8: 2.P_e@58.662,113.03 2.P_e 60.31,114.789 3_1.1@60.31,116.502
P4b: 4.P_b 4_4_2_1.2 20_4.1 | length 52.7
  Top Layer w0.8: 4_4_2_1.2 43.934,120.583 73,120.583 20_4.1 77.081,114.161 4.P_b
P4c: 
P4e: 4.P_e 20_1.@73.811,116.502 | length 3.6
  Top Layer w0.8: 4.P_e@72.608,113.371 73.811,114.573 20_1.@73.811,116.502
P6b: 6.P_b 6_4_2_1.2 24_4.1 | length 59.2
  Top Layer w0.8: 6_4_2_1.2 48.238,122.883 84.035,122.883 24_4.1 88.446,114.532 88.446,111.682 6.P_b
P6c: 
P6e: 6.P_e 24_1.1 | length 3.7
  Top Layer w0.8: 6.P_e 86.221,113.317 87.114,114.21 24_1.1
P8b: 8.P_b 8_4_2_1.2 25_4.1 | length 62
  Top Layer w0.8: 8_4_2_1.2 50.642,126.758 52.178,125.222 93.853,125.222 100.823,118.252 101.047,118.252 102.567,116.732 103.394,116.732 25_4.1 103.394,116.272 103.394,115.457 101.219,113.282 8.P_b
P8c: 
P8e: 8.P_e 25_1.@100.322,116.502 | length 4.8
  Top Layer w0.8: 8.P_e 98.02,113.006 98.02,114.2 25_1.@100.322,116.502
P10b: 10.P_b 10_4_2_1.2 26_4.1 | length 58.9
  Top Layer w0.8: 10_4_2_1.2 50.39,124.033 89.489,124.033 26_4.1 97.02,116.347 93.841,113.169 10.P_b
P10c: 
P10e: 10.P_e 26_1.1 | length 5.1
  Top Layer w0.8: 10.P_e 90.412,112.978 93.718,116.284 26_1.1
P12b: 11_4.1 12.P_b 12_4_2_1.2 | length 56
  Top Layer w0.8: 12_4_2_1.2 46.086,121.733 78.581,121.733 11_4.1 83.63,116.32 83.63,113.788 12.P_b
P12c: 
P12e: 11_1.1 12.P_e | length 4
  Top Layer w0.8: 12.P_e 79.3,113.336 80.645,114.681 80.645,116.367 11_1.1
P14b: 13_4.1 14.P_b 14_4_2_1.2 | length 49.5
  Top Layer w0.8: 14_4_2_1.2 41.782,119.433 67.546,119.433 13_4.1 70.364,116.389 70.364,114.302 14.P_b
P14c: 
P14e: 13_1.1 14.P_e | length 4.2
  Top Layer w0.8: 14.P_e 65.52,113.465 66.914,114.859 13_1.1@66.914,116.502 ; 13_1.1 13_1.1@67.351,116.326
P16b: 6_4.1 16.P_b 16_4_2_1.2 | length 43
  Top Layer w0.8: 16.P_b 57.008,114.662 6_4.1@57.008,116.502
  Bottom Layer w0.8: 16_4_2_1.2 29.278,125.333 48.438,125.333 6_4.1
P16c: 
P16e: 6_1.1 16.P_e | length 4.2
  Top Layer w0.8: 16.P_e 52.197,113.534 52.475,113.811 53.706,115.043 6_1.1@53.706,116.377 ; 6_1.1 6_1.1@54.092,116.377
VCC: 3_1.2 3_4.2 4.7uF.1 6_1.2 6_4.2 11_1.2 11_4.2 13_1.2 13_4.2 20_1.@73.811,127.052 20_4.2 24_1.2 24_4.2 25_1.@100.322,127.052 25_4.2 26_1.2 26_4.2 47uF.1 LED.1@86.496,64.77 Regulator.in | length 237.8
  Top Layer w0.8: 6_1.2 6_4.2 3_1.2 3_4.2 13_1.2 13_4.2 73.811,127.052 20_4.2 11_1.2 11_4.2 24_1.2 24_4.2 26_1.2 26_4.2 100.322,127.052 25_4.2
  Bottom Layer w0.8: Regulator.in 33.274,64.503 36.976,60.801 36.976,60.687 37.02,60.642 44.196,60.642 ; 52.231,60.359 55.621,63.749 56.042,63.749 56.432,64.139 56.432,64.56 57.11,65.238 62.484,65.238 64.147,66.901 71.965,66.901 73.593,65.273 73.593,64.648 75.221,63.02 82.392,63.02 84.142,64.77 84.455,64.77 84.455,62.865 88.267,62.865 88.5,62.632 cw(c87.935,62.065) 88.503,62.629 88.613,62.504 ccw(c91.059,64.643) 93.125,62.134 93.591,61.668 94.779,60.48 96.229,60.48 97.254,61.505 97.254,107.298 98.033,108.077 100.203,108.077 105.374,113.248 105.374,126.009 104.56,126.822 103.853,126.822 25_4.2 100.322,127.052 26_4.2 26_1.2 24_4.2 24_1.2 11_4.2 11_1.2 20_4.2 73.811,127.052 13_4.2 13_1.2 3_4.2 3_1.2 6_4.2 6_1.2
pads on no net: ULN2803.10 ULN2804.10 ULN2805.10
copper on no net: | length 127.7
  Top Layer w0.8: 25.872,133.055 25.874,133.563 ; 27.87,132.633 25.873,133.309 ; 27.876,133.966 25.873,133.309 ; 55.248,133.17 25.873,133.309 ; 77.016,133.067 106.391,132.928 ; 104.388,132.271 106.391,132.928 ; 104.394,133.604 106.391,132.928 ; 106.39,132.674 106.392,133.182 ; 108.052,59.66 108.712,57.658 ; 108.292,126.779 108.966,128.777 ; 108.458,57.659 108.966,57.657 ; 108.712,128.778 109.22,128.776 ; 108.801,82.667 108.712,57.658 ; 108.877,103.768 108.966,128.777 ; 109.386,59.656 108.712,57.658 ; 109.626,126.775 108.966,128.777

## Polygon pours and split planes (outlines as drawn)
VCC on Bottom Layer "VCC_L02_P000" (solid, pour order 0): 70.231,63.5 52.959,63.5 52.959,67.945 70.866,67.945 74.676,67.945 74.676,63.246 76.581,63.246 79.375,66.04 93.091,66.04 93.853,65.278 93.853,61.341 94.361,60.833 96.012,60.833 96.647,61.468 98.171,61.468 98.171,60.452 97.663,59.817 96.266,59.817 79.893,59.944 73.787,59.944
VCC on Bottom Layer "VCC_L02_P005" (solid, pour order 5): 52.451,127.508 53.213,128.27 104.648,128.27 106.045,126.873 106.045,109.982 104.013,107.95 99.314,107.95 98.679,107.315 98.679,60.706 97.028,59.055 97.028,107.95 97.282,107.95 98.425,109.093 100.457,109.093 104.648,113.284 104.648,117.729 103.378,118.999 57.15,118.999 52.324,123.825
GND on Bottom Layer "GND_L02_P002" (solid, pour order 2): 51.689,58.293 56.261,62.865 69.977,62.865 72.898,59.944 73.152,59.69 73.533,59.69 97.917,59.69 98.425,60.198 98.425,86.614 99.187,87.376 104.14,87.376 105.283,86.233 105.283,59.69 103.886,58.293
GND on Bottom Layer "GND_L02_P004" (solid, pour order 4): 25.908,59.69 105.283,59.69 105.283,58.314 27.368,58.229
GND on Bottom Layer "GND_L02_P003" (solid, pour order 3): 25.908,112.776 26.67,113.538 26.67,113.792 28.575,113.792 28.702,113.665 28.702,91.059 29.718,90.043 49.119,90.043 49.418,88.773 29.464,88.773 28.575,87.884 28.575,85.725 39.497,85.725 39.497,83.566 34.036,83.566 31.115,83.566 29.972,82.423 29.972,80.645 31.75,80.645 32.893,79.502 32.893,71.755 31.568,69.868 32.512,68.453 33.782,68.453 34.29,67.945 34.29,67.056 33.782,66.294 32.639,66.294 32.004,65.659 32.004,60.452 32.766,59.69 36.322,59.69 36.322,59.309 35.306,58.293 26.162,58.293 26.162,64.516
VCC on Bottom Layer "VCC_L02_P001" (solid, pour order 1): 47.371,59.944 47.371,65.024 50.292,67.945 56.388,67.809 56.388,63.246 53.086,59.944
VCC on Top Layer "VCC_L01_P007" (solid, pour order 7): 75.946,64.77 53.594,63.627 51.943,67.818 70.739,67.818 74.676,67.818 81.661,67.818 87.503,67.818 87.503,63.627 76.93,63.627
VCC on Top Layer "VCC_L01_P008" (solid, pour order 8): 47.772,60.833 47.371,61.234 47.371,64.369 50.312,67.31 51.963,67.31 55.753,63.519 55.753,62.611 53.213,60.071 48.025,60.071
GND on Top Layer "GND_L01_P010" (solid, pour order 10): 26.425,59.681 105.229,59.681 105.229,58.304 27.802,58.304
GND on Top Layer "GND_L01_P009" (solid, pour order 9): 52.07,58.42 56.388,62.738 70.733,62.738 73.632,59.563 97.536,59.563 98.298,60.325 98.298,86.487 99.06,87.249 104.013,87.249 105.156,86.106 105.156,59.563 104.013,58.42
GND on Top Layer "GND_L01_P006" (solid, pour order 6): 25.863,112.801 26.625,113.563 26.625,113.817 28.575,113.817 28.575,91.166 29.504,90.237 28.784,90.957 29.073,88.509 28.784,87.655 28.784,85.75 39.452,85.75 39.452,83.591 33.991,83.591 31.07,83.591 29.927,82.448 29.927,80.67 31.705,80.67 32.848,79.527 32.848,71.78 31.523,69.894 32.467,68.478 33.737,68.478 34.245,67.97 34.245,67.081 33.737,66.319 32.594,66.319 31.959,65.684 31.959,60.477 32.721,59.715 36.277,59.715 36.277,59.334 35.261,58.318 26.117,58.318 26.117,64.541

## Keep-outs
Keep-Out Layer:
  lines w0.6: 25.749,57.626 106.426,57.626 106.426,128.778 25.749,128.778 25.749,57.626

## Other copper
Top Layer:
  rectangle net VCC: 53.086,125.984 105.664,128.016
  rectangle net VCC: 32.768,60.198 36.959,65.479
  rectangle net Input: 33.274,68.961 36.83,83.185
  rectangle net Input: 31.369,81.026 36.703,83.185
  rectangle net VCC: 36.449,60.071 48.895,61.341
  rectangle net GND: 26.416,58.42 31.75,80.518
  text "80.519 (mm)" at 55.493,131.369 h2 r359.73
  text "71.119 (mm)" at 110.602,82.914 h2 r89.8
Bottom Layer:
  rectangle net VCC: 32.766,60.198 36.957,65.532
  rectangle net GND: 26.465,58.944 31.799,80.645
  rectangle net Input: 31.369,81.026 36.703,83.185
  rectangle net VCC: 36.576,59.944 48.133,61.341
  rectangle net Input: 33.147,68.961 36.703,83.185
  text "AYESHA" at 86.622,88.511 h2.5
  text "Exp 9" at 86.622,85.28 h2.5
  text "B2" at 71.89,84.828 h2.5
Multi-Layer:
  circle w2.5: c29.464,121.158 r1.25
  circle w2.5: c101.727,122.682 r1.25
  circle w2.5: c91.059,64.643 r1.25
  circle w2.5: c49.784,64.135 r1.25

## Text inside footprints (layer, text, board x,y; h text height)
2: Bottom Overlay "c" at 56.63,110.22 h1.5 r88.09; Bottom Overlay "e" at 57.392,113.903 h1.5 r90; Bottom Overlay "b" at 58.662,109.077 h1.52 r90
4: Bottom Overlay "c" at 70.346,110.22 h1.5 r88.09; Bottom Overlay "e" at 71.108,113.903 h1.5 r90; Bottom Overlay "b" at 72.378,109.077 h1.52 r90
4.7uF: Bottom Overlay "+" at 64.262,66.167 h1.5 r90
6: Bottom Overlay "c" at 84.189,110.22 h1.5 r88.09; Bottom Overlay "e" at 84.951,113.903 h1.5 r90; Bottom Overlay "b" at 86.221,109.077 h1.52 r90
8: Bottom Overlay "c" at 100.711,110.744 h1.5 r178.09; Bottom Overlay "e" at 97.473,111.125 h1.5 r180; Bottom Overlay "b" at 101.854,112.776 h1.52 r180
10: Bottom Overlay "c" at 93.333,110.728 h1.5 r178.09; Bottom Overlay "e" at 89.65,111.49 h1.5 r180; Bottom Overlay "b" at 94.476,112.76 h1.52 r180
12: Bottom Overlay "c" at 77.268,110.22 h1.5 r88.09; Bottom Overlay "e" at 78.03,113.903 h1.5 r90; Bottom Overlay "b" at 79.3,109.077 h1.52 r90
14: Bottom Overlay "c" at 63.488,110.22 h1.5 r88.09; Bottom Overlay "e" at 64.25,113.903 h1.5 r90; Bottom Overlay "b" at 65.012,109.077 h1.52 r90
16: Bottom Overlay "c" at 49.772,110.22 h1.5 r88.09; Bottom Overlay "e" at 50.534,113.903 h1.5 r90; Bottom Overlay "b" at 51.804,109.077 h1.52 r90
47uF: Bottom Overlay "+" at 57.404,66.294 h1.5 r90
Designator1: Top Overlay "Block Connector" at 34.925,76.454 h0.51 r90
Regulator: Bottom Overlay "317" at 30.574,63 h1.52; Bottom Overlay "LM" at 29.874,70.05 h1.52